# Altium PCB UART-FIBER.PcbDoc
Units mm, origin at the board's own origin, x right, y up, seen from the top; angles counter-clockwise.
Board outline 26.04 x 25.91 mm, 2 copper layers (Top Layer, Bottom Layer), stack 1.671 mm thick; 18 components, 10 nets, 68 pads, 9 vias.
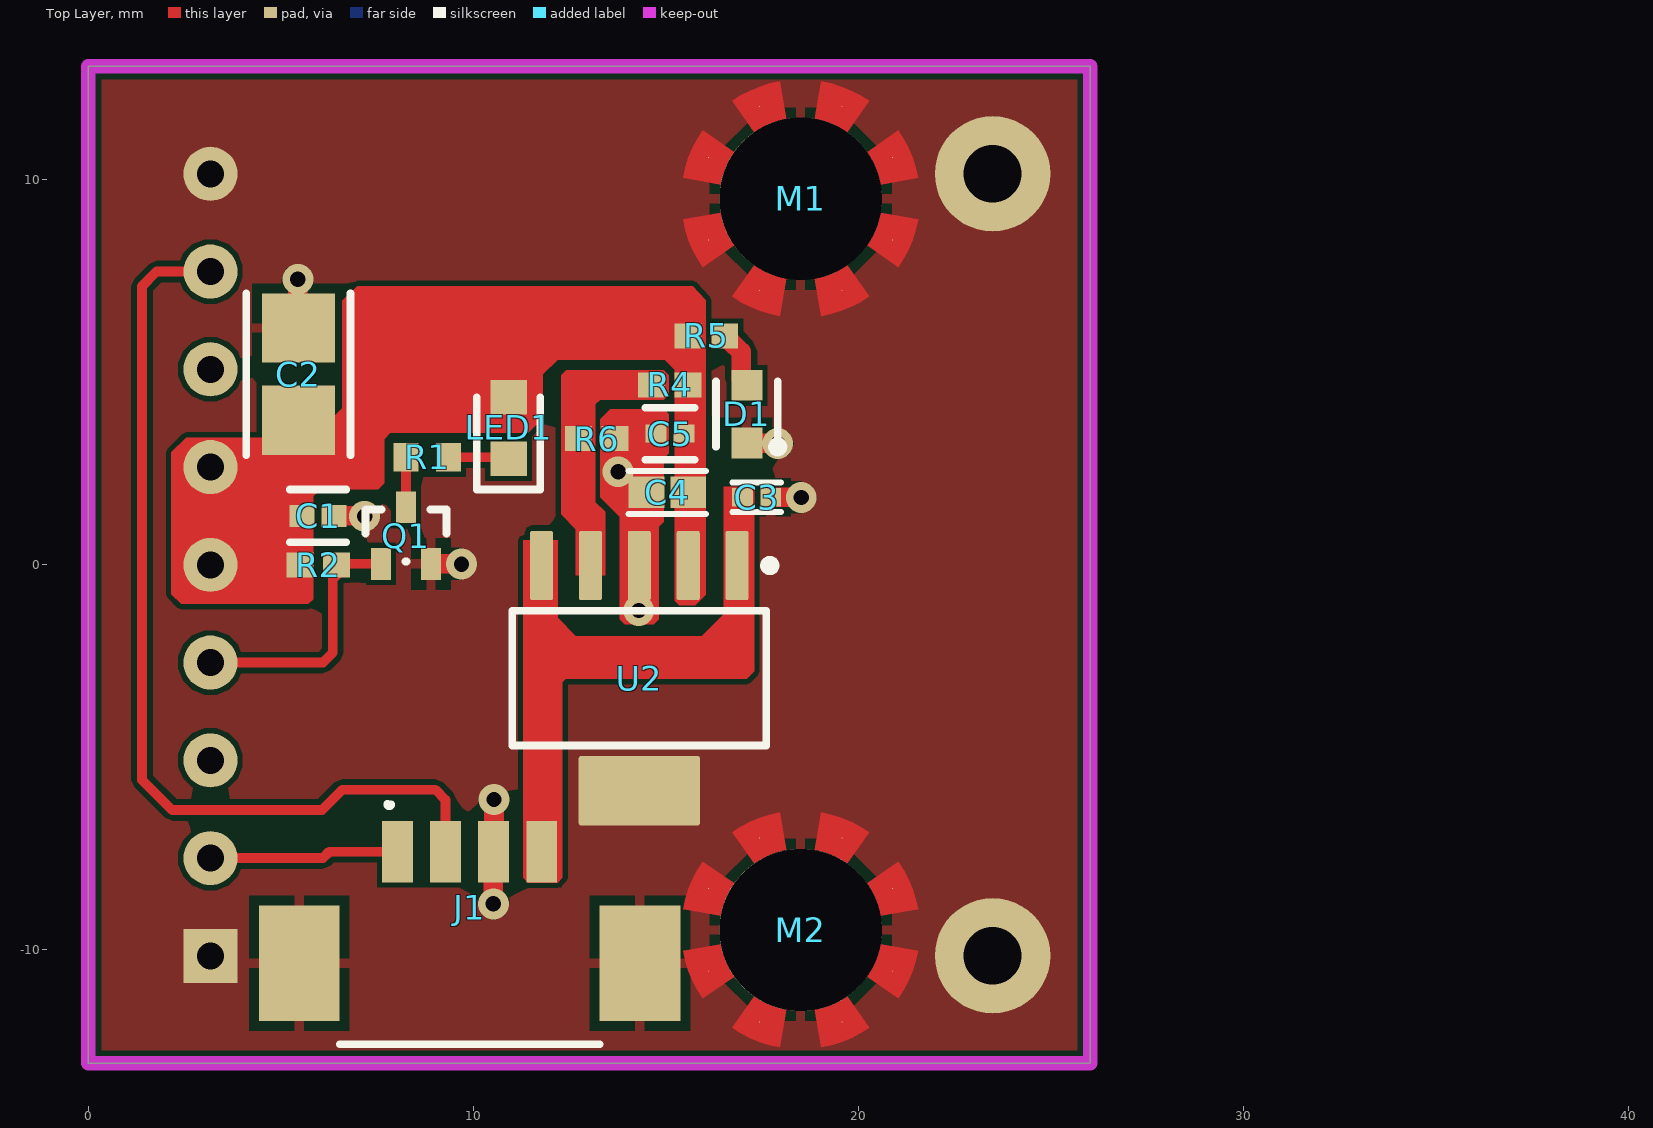
[diagram p0: Top Layer view]
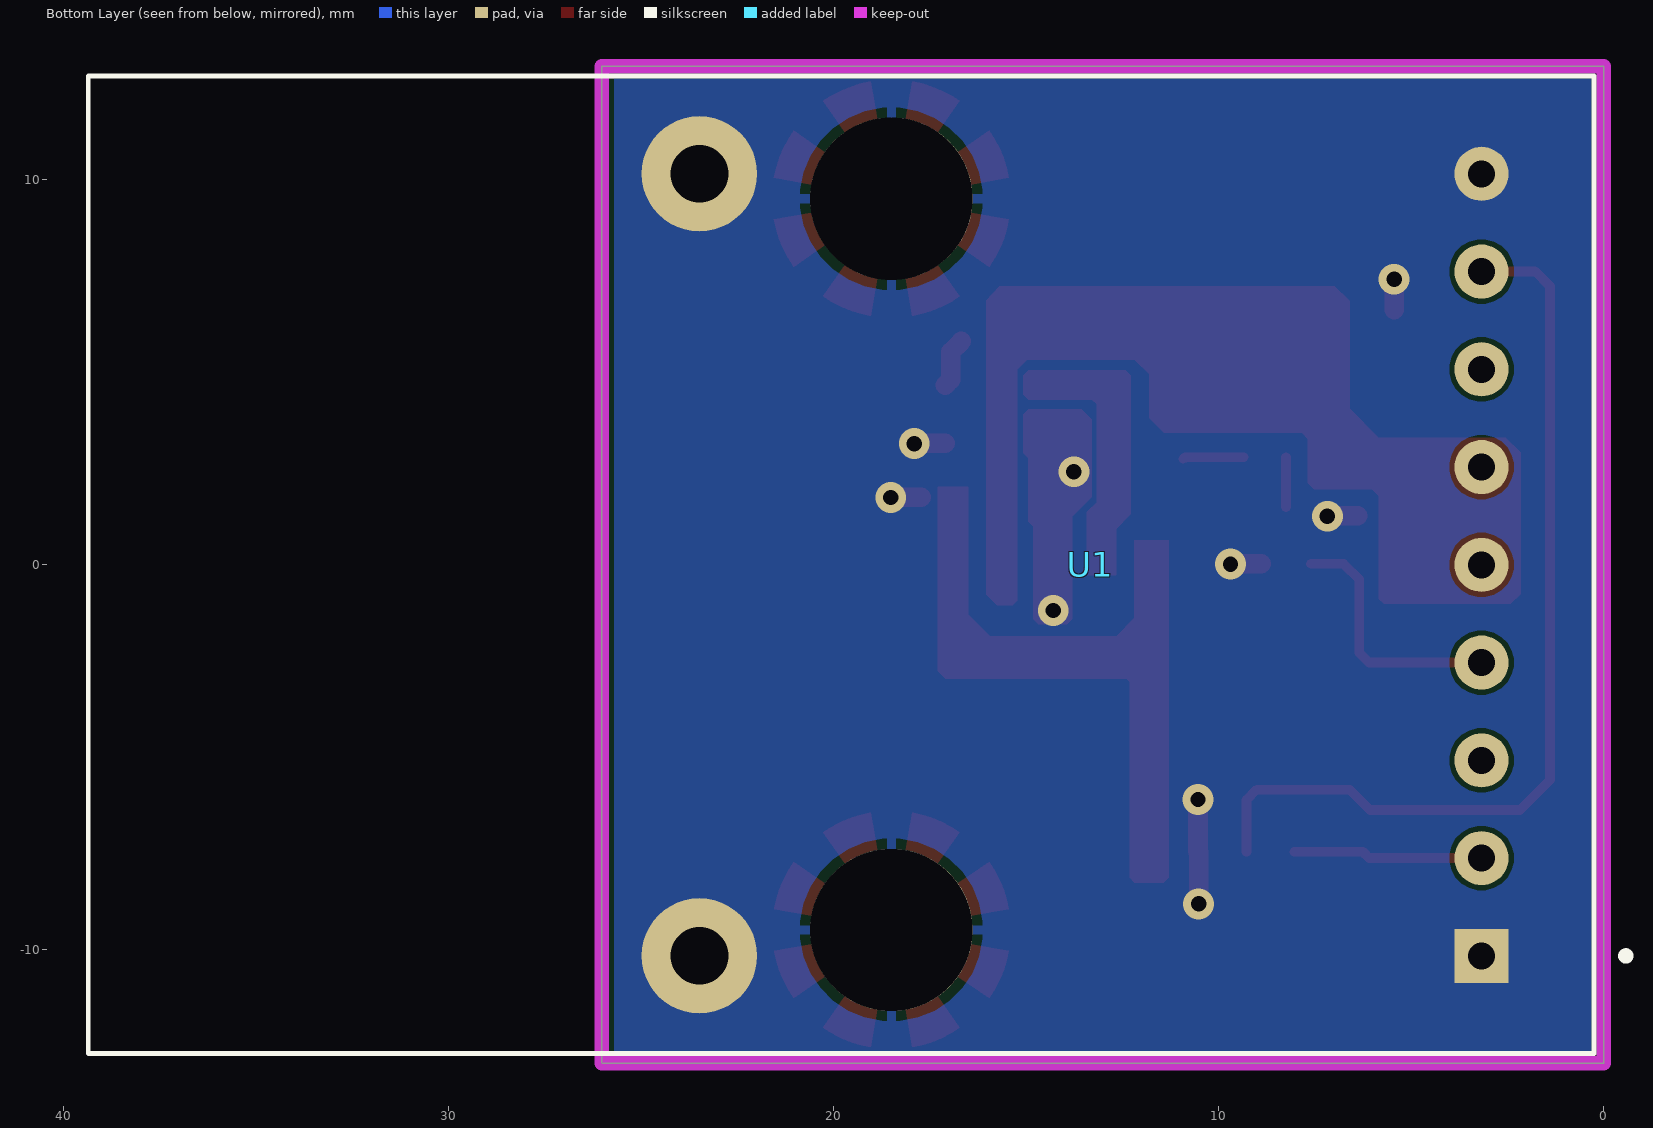
[diagram p1: Bottom Layer view, seen from below]

## Layer stack, top to bottom
Top Solder: solder mask 0.0102, Solder Resist, Dk 3.5
Top Layer: signal copper 0.0356
Dielectric 1: dielectric 1.6, FR-4, Dk 4.8
Bottom Layer: signal copper 0.0356
Bottom Solder: solder mask 0.0102, Solder Resist, Dk 3.5

## Board outline
-0.007,-12.967 26.028,-12.967 26.028,12.941 -0.007,12.941

## Design rules (kind name [scope] priority, off if disabled: settings)
Clearance [All] p1: gap=0.127 ignorepadtopadclearanceinfootprint=FALSE
PolygonConnect PolygonConnect_1 [HasFootprint('XCVR_AFBR-5803Z') OR HasFootprint('DCQ0006A_L') OR HasFootprint('SMTSO-2540CTJ')] p1: connectstyle=Direct reliefconductorwidth=0.254 reliefentries=4 polygonreliefangle="90 Angle" airgapwidth=0.254
PolygonConnect [All] p2: thpad.connectstyle=Relief thpad.reliefconductorwidth=0.254 thpad.reliefentries=4 thpad.polygonreliefangle="90 Angle" thpad.airgapwidth=0.254 smdpad.connectstyle=Relief smdpad.reliefconductorwidth=0.254 smdpad.reliefentries=4 smdpad.polygonreliefangle="90 Angle" smdpad.airgapwidth=0.254 via.connectstyle=Direct via.reliefconductorwidth=0.254 via.reliefentries=4 via.polygonreliefangle="90 Angle" via.airgapwidth=0.254
RoutingVias [All] p1: holewidth=0.4 width=0.8 viastyle="Through Hole" minholewidth=0.4 minwidth=0.8 maxholewidth=0.4 maxwidth=0.8
SolderMaskExpansion [All] p1: expansion=0.102 istentingtop=FALSE
SupplyNets "Schematic Supply Nets_3" [InNet('+5V')] p1: voltage=0.000
SupplyNets "Schematic Supply Nets_2" [InNet('VCC')] p2: voltage=0.000
SupplyNets "Schematic Supply Nets" [InNet('GND')] p3: voltage=0.000
Width [All] p1: maxlimit=0.508 minlimit=0.254 preferedwidth=0.254
30 further rules are at their usual default settings.

## Components (designator, comment, footprint, x,y, rotation, side; value= is the part's Value field where it differs from the comment)
C1 "C1005X7R1H104K050BB" FP-C1005-050-0_05-IPC_B 5.962,1.257 r180 top value=100n
C2 "C3216X5R0G107M160AB" FP-C3216-160-0_3-IPC_B 5.454,4.94 r270 top value=100u
C3 "C1608JB0J106K080AB" FP-C1005-050-0_05-IPC_C 17.358,1.743 r0 top value=10u
C4 "C1608JB0J106K080AB" FP-C1608-080-0_1-IPC_C 15.04,1.87 r180 top value=10u
C5 "C1005X7R1H104K050BB" FP-C1005-050-0_05-IPC_C 15.108,3.396 r180 top value=100n
D1 "LTST-C191TBKT" FP-LTST-C191TBKT-MFG 17.104,3.902 r90 top
J1 "53261-0471" 53261-0471 9.899,-8.268 r0 top
LED1 "LTST-C191KFKT" LEDC1608X55N 10.915,3.543 r90 top value=Orange
M1 "SMTSO-2540CTJ" SMTSO-2540CTJ 18.5,9.5 r0 top
M2 "SMTSO-2540CTJ" SMTSO-2540CTJ 18.5,-9.5 r0 top
Q1 "RU1J002YNTCL" FP-UMT3F-MFG 8.248,0.749 r90 top
R1 "RC0402FR-07240RL" RESC0402(1005)_M 8.798,2.781 r180 top value=240R
R2 "RC0402FR-071K3L" RESC1005X40X25ML05T10 5.968,-0.013 r180 top value=1K3
R4 "RC0402FR-076K98L" RESC1005X40X25ML05T10 15.105,4.664 r0 top value=6K98
R5 "RC0402FR-071K2L" RESC1005X40X25ML05T10 16.055,5.934 r0 top value=1K2
R6 "RC0402FR-074K02L" RESC1005X40X25ML05T10 13.2,3.267 r180 top value=4K02
U1 "FR1253-S2" XCVR_AFBR-5803Z 3.168,-0.013 r0 bottom locked
U2 "TPS73801DCQR" DCQ0006A_L 14.31,-2.956 r270 top

## Footprints (in the part's own frame and the unit in brackets; to place one, negate y for a bottom-side part, rotate by r counter-clockwise, add the part's x,y. Pads: shape width x height; smd on the part's side, far side on the other; paste and mask are expansions set on the pad)
53261-0471 [mm]
  rect 0.8x1.6 smd: 1(-1.875,0.8) 2(-0.625,0.8) 3(0.625,0.8) 4(1.875,0.8)
  rect 2.1x3 smd: MP1(4.425,-2.1) MP2(-4.425,-2.1)
  silkscreen extent -3.37,-4.2 3.37,2.05, body extent -5.07,-3.69 5.07,1.51, height 3.4
DCQ0006A_L [mm] "SOT223, 6-Leads, Body 6.55x3.55mm, Pitch 1.27mm, IPC High Density"
  rrect17% 1.8x0.6 smd: 1(-2.925,2.54) 2(-2.925,1.27) 3(-2.925,0) 4(-2.925,-1.27) 5(-2.925,-2.54)
  rrect6% 1.8x3.15 smd: 6(2.925,0)
  silkscreen extent -3.05,-3.3 1.75,3.52, body extent -3.48,-3.25 3.48,3.25, height 1.64
FP-C1005-050-0_05-IPC_B [mm]
  rect 0.639x0.572 smd paste+0 mask+0: 1(-0.417,0) 2(0.417,0)
  silkscreen extent -0.74,-0.69 0.74,0.69, body extent -0.89,-0.44 0.89,0.44, height 0.25
FP-C1005-050-0_05-IPC_C [mm]
  rect 0.539x0.472 smd paste+0 mask+0: 1(-0.367,0) 2(0.367,0)
  silkscreen extent -0.64,-0.38 0.64,0.38, body extent -0.5,-0.25 0.5,0.25, height 0.55
FP-C1608-080-0_1-IPC_C [mm]
  rect 0.931x0.812 smd paste+0 mask+0: 1(-0.541,0) 2(0.541,0)
  silkscreen extent -1.01,-0.56 1.01,0.56, body extent -1.11,-0.55 1.11,0.55, height 0.25
FP-C3216-160-0_3-IPC_B [mm]
  rect 1.804x1.906 smd paste+0 mask+0: 1(-1.201,0) 2(1.201,0)
  silkscreen extent -2.1,-1.35 2.1,1.35, body extent -2.35,-1.2 2.35,1.2, height 0.25
FP-LTST-C191TBKT-MFG [mm]
  rect 0.8x0.8 smd paste+0 mask+0: 1(-0.75,0) 2(0.75,0)
  silkscreen extent -0.97,-0.93 0.85,0.8, body extent -1.25,-0.55 1.25,0.55, height 0.25
FP-UMT3F-MFG [mm]
  rect 0.83x0.52 smd paste+0 mask+0: 1(-0.735,0.65) 2(-0.735,-0.65) 3(0.735,0)
  silkscreen extent -0.67,-1.05 0.67,1.05, body extent -1.25,-1.15 1.25,1.15, height 0.25
LEDC1608X55N [mm]
  rect 0.9x0.95 smd: 1(-0.8,0) 2(0.8,0)
  silkscreen extent -1.6,-0.82 0.8,0.82, body extent -0.83,-0.4 0.77,0.4, height 0.55
RESC0402(1005)_M [mm] "Chip Resistor, Body 1.0x0.5mm, IPC Low Density"
  rect 0.65x0.75 smd: 1(-0.55,0) 2(0.55,0)
  body extent -0.52,-0.28 0.53,0.28, height 0.4
RESC1005X40X25ML05T10 [mm] "Chip Resistor, 2-Leads, Body 1.00x0.50mm, IPC Low Density"
  rect 0.7x0.65 smd: 1(-0.475,0) 2(0.475,0)
  body extent -0.53,-0.27 0.53,0.28, height 0.4
SMTSO-2540CTJ [mil] "M2.5 L:40mm BRASS SMT surface mount nut post"
  round 1 smd: 1(-94.12,-42.21) 1(-94.12,42.21) 1(-42.21,-94.12) 1(-42.21,94.12) 1(42.21,-94.12) 1(42.21,94.12) 1(94.12,-42.21) 1(94.12,42.21)
  round 166.14 hole 166.14 paste+0 mask+4: 1(0,0)
  Top Layer region: -47.65,-68.05 -31.79,-76.75 -14.43,-81.81 -14.43,-81.81 -21.19,-120.19 -46.71,-112.76 -70,-99.98 -70,-99.98
  Top Layer region: 14.43,-81.81 31.79,-76.75 47.65,-68.05 47.65,-68.05 70,-99.98 46.71,-112.76 21.19,-120.19 21.19,-120.19
  Top Layer region: 68.05,-47.65 76.75,-31.79 81.81,-14.43 81.81,-14.43 120.19,-21.19 112.76,-46.71 99.98,-70 99.98,-70
  Top Layer region: 81.81,14.43 76.75,31.79 68.05,47.65 68.05,47.65 99.98,70 112.76,46.71 120.19,21.19 120.19,21.19
  Top Layer region: 47.65,68.05 31.79,76.75 14.43,81.81 14.43,81.81 21.19,120.19 46.71,112.76 70,99.98 70,99.98
  Top Layer region: -14.43,81.81 -31.79,76.75 -47.65,68.05 -47.65,68.05 -70,99.98 -46.71,112.76 -21.19,120.19 -21.19,120.19
  Top Layer region: -68.05,47.65 -76.75,31.79 -81.81,14.43 -81.81,14.43 -120.19,21.19 -112.76,46.71 -99.98,70 -99.98,70
  Top Layer region: -81.81,-14.43 -76.75,-31.79 -68.05,-47.65 -68.05,-47.65 -99.98,-70 -112.76,-46.71 -120.19,-21.19 -120.19,-21.19
  body extent -109,-109 109,109, height 157
XCVR_AFBR-5803Z [mm]
  rect 1.408x1.408 hole 0.7: 1(0,10.16)
  round 1.408 hole 0.7: 2(0,7.62) 3(0,5.08) 4(0,2.54) 5(0,0) 6(0,-2.54) 7(0,-5.08) 8(0,-7.62) 9(0,-10.16)
  round 3 hole 1.5: S1(20.32,10.16) S2(20.32,-10.16)
  silkscreen extent -3.85,-12.7 36.2,12.7, body extent -2.92,-12.7 36.2,12.7, height 11.18

## Part data
C1: library part CMP-2000-05393-2, "Multilayer Ceramic Capacitors 100nF ±10% 50V X7R SMD 0402", Case Code (Imperial)=0402, Case Code (Metric)=1005, Dielectric=X7R, Dielectric Material=Ceramic, Max Operating Temperature=125°C, Min Operating Temperature=-55°C, Package Quantity=1, Tolerance=10%, Voltage=50V, Case/Package=0402, Construction=Flat, Depth=0.5mm, Height=0.5mm, Lead Free="Lead Free", Length=1mm, Mount="Surface Mount", Packaging="Tape and Reel", Part Number=C1005X7R1H104K050BB, Radiation Hardening=No, REACH SVHC="No SVHC", Resistor Type=Ceramic, RoHS Compliant=Yes, Series=C, Termination=SMD/SMT, Thickness=0.022inch, Voltage Rating=50V, Voltage Rating (DC)=50V, Weight=2.3E-05oz, Width=0.02inch
C2: library part CMP-08246-005374-1, "Multilayer Ceramic Capacitors 100uF ±20% 4V X5R SMD 1206", Case Code (Imperial)=1206, Case Code (Metric)=3216, Dielectric=X5R, Dielectric Material=Ceramic, Max Operating Temperature=85°C, Min Operating Temperature=-55°C, Package Quantity=2000, Tolerance=20%, Voltage Rating=4V, Case/Package=1206, Construction=Flat, Depth=1.6mm, Height=1.6mm, Lead Free="Lead Free", Length=3.2mm, Mount="Surface Mount", Packaging="Tape and Reel", Part Number=C3216X5R0G107M160AB, Radiation Hardening=No, Resistor Type=Ceramic, RoHS Compliant=Yes, Series=C, Termination=SMD/SMT, Thickness=0.071inch, Voltage Rating (DC)=4V, Weight=0.000571oz, Width=0.063inch
C3 C4: "MLCC 10μF ±10% 6.3V JB SMD 0603", Case Code (Imperial)=0603, Case Code (Metric)=1608, Dielectric Material=Ceramic, Max Operating Temperature=85°C, Min Operating Temperature=-25°C, Package Quantity=4000, Tolerance=10%, Voltage Rating=6.3V, Case/Package=0603, Height=0.8mm, Lead Free="Lead Free", Length=0.063inch, Mount="Surface Mount", Packaging="Tape and Reel", Resistor Type=Ceramic, RoHS Compliant=Yes, Series=C, Termination=SMD/SMT, Thickness=0.035inch, Voltage Rating (DC)=6.3V, Width=0.8mm
C5: "MLCC 100nF ±10% 50V X7R SMD 0402", Case Code (Imperial)=0402, Case Code (Metric)=1005, Dielectric=X7R, Dielectric Material=Ceramic, Max Operating Temperature=125°C, Min Operating Temperature=-55°C, Package Quantity=1, Tolerance=10%, Voltage=50V, Case/Package=0402, Construction=Flat, Depth=0.5mm, Height=0.5mm, Lead Free="Lead Free", Length=1mm, Mount="Surface Mount", Packaging="Tape and Reel", Part Number=C1005X7R1H104K050BB, Radiation Hardening=No, REACH SVHC="No SVHC", Resistor Type=Ceramic, RoHS Compliant=Yes, Series=C, Termination=SMD/SMT, Thickness=0.022inch, Voltage Rating=50V, Voltage Rating (DC)=50V, Weight=2.3E-05oz, Width=0.02inch
D1: library part CMP-22017-000008-1, "LED BLUE CLEAR CHIP SMD", Case Code (Imperial)=0603, Case Code (Metric)=1608, Color=Blue, Forward Current=20mA, Forward Voltage=3.8V, Lens Color=Colorless, Max Operating Temperature=80°C, Max Power Dissipation=75mW, Min Operating Temperature=-20°C, Package Quantity=1, Power Dissipation=76mW, Reverse Voltage=5V, Case/Package=0603, Depth=1.6mm, Dominant Wavelength=475nm, Height=0.55mm, Illumination Color=Blue, Lead Free="Lead Free", Length=0.8mm, Lens Style=Diffused, Lens Transparency=Clear, Luminous Intensity=180mcd, Mount="Surface Mount", Number of Elements=1, Number of LEDs=1, Number of Pins=2, Packaging="Tape and Reel", Radiation Hardening=No, Test Current=20mA, Viewing Angle=130°, Wavelength=468nm, Width=0.8mm
J1: "Connector", Manufacturer_Name=Molex, Mouser Part Number=538-53261-0471, Arrow Part Number=53261-0471, Arrow Price/Stock=null?region=nac, Datasheet Link=http://www.molex.com/webdocs/datasheets/pdf/en-us//0532610471_PCB_HEADERS.pdf, Manufacturer_Part_Number=53261-0471, Mouser Price/Stock=https://www.mouser.co.uk/ProductDetail/Molex/53261-0471?qs=%252B72YyncTwW9e3et3PwnEMw%3D%3D
LED1: "LED", Manufacturer=Lite-On, Mouser Part Number=859-LTST-C191KFKT, Arrow Part Number=LTST-C191KFKT, Arrow Price/Stock=https://www.arrow.com/en/products/ltst-c191kfkt/lite-on-technology.html?utm_currency=USD&region=nac, Datasheet Link=https://datasheet.datasheetarchive.com/originals/distributors/Datasheets-305/79307.pdf, Height=0.55mm, Mouser Price/Stock=https://www.mouser.co.uk/ProductDetail/Lite-On/LTST-C191KFKT?qs=1bx9pL%2Fk%252BiAv01YAc0eitQ%3D%3D, Part Number=LTST-C191KFKT
Q1: "MOSFET N-CH 50V 0.2A UMT3F", Continuous Drain Current=200mA, Drain to Source Breakdown Voltage=50V, Drain to Source Resistance=1.6Ω, Gate To Source Voltage=8V, Input Capacitace At Vds="26pF @ 10V", Manufacturer=Rohm, Max Forward Diode Voltage=1.2V, Max Junction Temp=+150°C, Package=UMT3F, Power Dissipation=150mW, Pulse Drain Current=800mA, Temperature="to +150°C", Automotive=No, Category=Trans, ComponentLink2Description=Datasheet, ComponentLink2URL=https://d1d2qsbl8m0m72.cloudfront.net/en/products/databook/datasheet/discrete/transistor/mosfet/ru1j002yn-e.pdf, Depletion Mode=False, Device Class L1="Discrete Semiconductors", Device Class L2=Transistors, Device Class L3=MOSFETs, Digikey Description="MOSFET N-CH 50V 0.2A UMT3F", Drain To Source Voltage=50V, Height=1.05mm, Lead Free=Yes, Manufacturer Part Number=RU1J002YNTCL, Mouser Description="MOSFET 0.9V Drive Nch MOSFET", Number Of Channels=1, Number Of N Channels=1, Octopart=https://octopart.com/ru1j002yntcl-rohm-47197697, RoHS=TRUE, Rthja Max=833°C/W, Standoff Height=0mm, Temperature Range High=+150°C, Threshold Vgs Max=0.8V, Threshold Vgs Min=0.3V, Turn Off Delay Time=17ns, Turn On Delay Time=5ns
R1: library part CMP-1011-00438-1, "240R 0.063W 1% 0402 (1005 Metric)  SMD", Case-EIA=0402, Case-Metric=1005, Power="0.063 W", Tolerance="1 %", Part Number=RC0402FR-07240RL, Technology=SMT
R2: library part CMP-2002-07459-1, Manufacturer="Yageo / Phycomp", Part Number=RC0402FR-071K3L
R4: library part CMP-2002-07119-1, Manufacturer="Yageo / Phycomp", Part Number=RC0402FR-076K98L
R5: library part CMP-2002-07456-1, Manufacturer="Yageo / Phycomp", Part Number=RC0402FR-071K2L
R6: library part CMP-2002-07710-1, Manufacturer="Yageo / Phycomp", Part Number=RC0402FR-074K02L
U1: library part FR12XX, "Fiber Optic Transceiver Module General Purpose 100Mbps 1300nm 3.3V, 5V SC Through Hole", Package=None, Digi-Key_Part_Number=516-1991-ND, Digi-Key_Purchase_URL=https://www.digikey.com/product-detail/en/broadcom-limited/AFBR-5803Z/516-1991-ND/1990389?utm_source=snapeda&utm_medium=aggregator&utm_campaign=symbol, MF="Broadcom Limited", MP=AFBR-5803Z, SnapEDA_Link=https://www.snapeda.com/parts/AFBR-5803Z/Broadcom%20Limited/view-part/125759/?ref=snap
U2: library part CMP-0395-00479-2, "Single Output Fast Transient Response LDO, 1 A, Adjustable 1.2 to 20 V Output, 2.2 to 20 V Input, 6-pin SOT-223 (DCQ), -40 to 125 degC, Green (RoHS & no Sb/Br)", Manufacturer="Texas Instruments", ComponentLink1Description="Manufacturer URL", ComponentLink1URL=http://www.ti.com/, ComponentLink2Description=Datasheet, ComponentLink2URL=http://www.ti.com/general/docs/lit/getliterature.tsp?genericPartNumber=TPS73801&fileType=pdf, ComponentLink3Description="Package Specification", ComponentLink3URL=http://www.ti.com/litv/pdf/mpds098c, DatasheetVersion=SLVS915A, Eco-Plan="Green (RoHS & no Sb/Br)", Iout(Max)(A)=1, Iq(Typ)(mA)=1, Mounting Technology="Surface Mount", PackageDescription="6-Pin Plastic Small Outline, Body 3.5 x 6.5 mm, Pitch 1.27 mm", PackageReference=DCQ0006A, PackageVersion=4202109/D, PartNumber=TPS73801DCQR, SubFamily="Single Channel LDO", Vdo(Typ)(mV)=300, Vin(Max)(V)=20, Vin(Min)(V)=2.2, Vout Adj(Max)(V)=20, Vout Adj(Min)(V)=1.2

## Via types
v1: diameter 0.8, hole 0.4, Top Layer to Bottom Layer, tented both sides, 9 vias

## Nets (pads, with @x,y where several pads share a name; then routed paths per layer and width w, separated by ;. In a path a pad name is that pad's centre, name@x,y a point inside that pad or via, vN(x,y) a via of type N, cw(c..) or ccw(c..) an arc to the next point about the centre after c; other vN are vias at no path point)
+5V: C3.1 J1.4 U2.1 U2.5
GND: C1.1 C2.1 C3.2 C4.2 C5.2 D1.1 J1.3 J1.MP1 J1.MP2 M1.1 M2.1 Q1.2 R6.1 U1.1 U1.9 U1.S1 U1.S2 U2.3 U2.6 | length 8.4
  Top Layer w0.508: C2.1@5.431,6.613 v1@5.431,7.399 ; C1.1 v1@7.165,1.257 ; Q1.2 v1@9.684,0.014 ; v1(10.519,-8.822) J1.3@10.519,-7.473 ; J1.3 10.534,-7.458 v1(10.534,-6.109) ; v1(13.76,2.404) 13.815,2.348 13.961,2.348 14.44,1.87 C4.2 ; v1@14.299,-1.194 U2.3@14.299,-0.407 ; D1.1 17.111,3.145 17.898,3.145 v1(17.904,3.138) ; C3.2 v1@18.511,1.743
  other v1: 14.292,-1.201 9.691,0.007 7.172,1.25 18.518,1.736 5.438,7.406
NetD1_2: D1.2 R5.2 | length 1.3
  Top Layer w0.508: R5.2@16.684,5.792 16.958,5.518 16.958,4.798 D1.2
NetJ1_1: J1.1 U1.2 | length 4.9
  Top Layer w0.254: U1.2 6.089,-7.633 6.254,-7.468 J1.1
NetJ1_2: J1.2 U1.8 | length 24.6
  Top Layer w0.254: U1.8 1.771,7.607 1.39,7.226 1.39,-5.601 2.172,-6.383 6.069,-6.383 6.597,-5.855 9.01,-5.855 9.274,-6.119 J1.2
NetLED1_1: LED1.1 R1.1 | length 1.6
  Top Layer w0.254: R1.1 10.877,2.781 LED1.1
NetQ1_3: Q1.3 R1.2 | length 1.3
  Top Layer w0.254: Q1.3 R1.2
NetR4_1: R4.1 R6.2 U2.4
SD: Q1.1 R2.1 U1.4 | length 6.6
  Top Layer w0.254: U1.4 6.089,-2.553 6.343,-2.299 6.343,-0.394 6.751,0.014 Q1.1
VCC: C1.2 C2.2 C4.1 C5.1 LED1.2 R2.2 R4.2 R5.1 U1.5 U1.6 U2.2
pads on no net: U1.3 U1.7

## Polygon pours and split planes (outlines as drawn)
GND on Top Layer "GND_L01_P000" (solid, remove dead copper, pour order 0): 0,12.944 0,-12.944 26.012,-12.944 26.012,12.934
GND on Bottom Layer "GND_L02_P001" (solid, pour order 1): 0.016,12.94 0.016,-12.99 26.028,-12.99 26.028,12.875 25.995,12.875

## Keep-outs
Keep-Out Layer:
  the board outline again, w0.381

## Other copper
Top Layer:
  region net +5V: 15.929,-1.87 16.505,-1.294 16.505,2.019 17.293,2.019 17.293,-2.779 17.099,-2.973 12.4,-2.973 12.312,-3.061 12.312,-8.141 12.185,-8.268 11.423,-8.268 11.296,-8.141 11.296,0.622 12.185,0.622 12.185,-1.391 12.663,-1.87
  region net NetR4_1: 12.659,-0.289 12.659,0.915 12.278,1.296 12.278,4.918 12.405,5.045 14.945,5.045 15.072,4.918 15.072,4.41 14.945,4.283 13.294,4.283 13.167,4.156 13.167,1.616 13.421,1.362 13.421,-0.289
  region net GND: 13.802,-1.432 13.929,-1.559 14.691,-1.559 14.818,-1.432 14.818,0.981 14.945,1.108 14.945,2.759 15.072,2.886 15.072,3.902 14.945,4.029 13.548,4.029 13.294,3.775 13.294,1.743 13.802,1.235
  region net VCC: 14.973,5.321 15.235,5.059 15.235,-0.949 15.35,-1.064 15.767,-1.064 16.037,-0.794 16.037,6.863 15.701,7.226 6.978,7.226 6.597,6.845 6.597,4.051 5.835,3.289 2.533,3.289 2.152,2.908 2.152,-0.775 2.406,-1.029 5.708,-1.029 5.835,-0.902 5.835,1.765 6.019,1.949 7.529,1.949 7.681,2.101 7.681,3.255 7.841,3.416 11.423,3.416 11.804,3.797 11.804,4.94 12.185,5.321